# EAGLE board audio-pa-250mW-7.2V (EAGLE 5.10)

Size 160 x 100 mm. Coordinates in mm from the lower left corner, seen from the top.
Outline: 0,0 160,0 160,100 0,100 0,0
Copper layers (1*16): Top 0.035mm / dielectric 1.5mm / Bottom 0.035mm
Design rules "default": minimum track width 10mil, minimum drill 24mil, track to track 8mil, track to pad 8mil, pad to pad 8mil, via to via 8mil, smd to smd 8mil, copper to edge 40mil, drill to drill 8mil, minimum pad ring 10mil, minimum via ring 8mil, stop-mask expansion 4mil, vias tented up to drill 0mil, thermal gap 10mil

## Footprints (pad centres in the part's own frame; a part is rotated, then mirrored left to right if it is on the bottom)
CPOL-RADIAL-10UF-25V = drill 0.7 pad 1.651 square: 1 1.27,0 | drill 0.7 pad 1.651 round: 2 -1.27,0
CAP-PTH-5MM = drill 0.7 pad 1.778 round: 1 -2.5,0; 2 2.5,0
CPOL-RADIAL-100UF-25V = drill 0.7 pad 1.651 square: 1 1.27,0 | drill 0.7 pad 1.651 round: 2 -1.27,0
DIODE-1N4148 = drill 0.9 pad 1.93 round: A -3.81,0; C 3.81,0
POTA_16 = drill 0.813 pad 2.54 octagon: ROTOR 0,0; SCCW -5.08,0; SCW 5.08,0
4,16O1,6 = drill 1.6 pad 4.166 octagon: 1 0,0
0207/2V = drill 0.813 pad 1.778 octagon: 1 -1.27,0; 2 1.27,0
AL60P = drill 1.016 pad 2.54 octagon: 1 -3.251,0; 2 3.251,0
TO92-EBC = drill 0.813 pad 1.524 long: B 0,-1.27; C 2.54,-1.27; E -2.54,-1.27

## Placement (x,y rotation side)
C1  10uF  [CPOL-RADIAL-10UF-25V]  40.64,58.42 90 top
C2  471  [CAP-PTH-5MM]  59.69,36.83 90 top
C3  2.2uF  [CPOL-RADIAL-10UF-25V]  35.56,43.18 0 top
C5  220uF  [CPOL-RADIAL-100UF-25V]  48.26,67.31 0 top
C7  220uF  [CPOL-RADIAL-100UF-25V]  60.96,59.69 0 top
D1  [DIODE-1N4148]  57.15,53.34 180 top
D2  1N4148  [DIODE-1N4148]  53.34,49.53 270 top
P1  [POTA_16]  3.81,40.64 270 top
PAD2  IN  [4,16O1,6]  8.89,2.54 0 top
R1  33k  [0207/2V]  54.61,46.99 180 top
R3  22k  [0207/2V]  44.45,48.26 90 top
R4  2.2k  [0207/2V]  49.53,54.61 90 top
R5  2R  [0207/2V]  63.5,53.34 90 top
R6  2.4k  [0207/2V]  58.42,54.61 90 top
R7  22k  [0207/2V]  44.45,36.83 270 top
R8  68R  [0207/2V]  44.45,54.61 90 top
R9  510R  [0207/2V]  57.15,53.34 180 top
R10  2R  [0207/2V]  67.31,53.34 270 top
SP1  AL60P  [AL60P]  64.77,69.85 0 top
T1  9015  [TO92-EBC]  49.53,46.99 270 top
T2  9014  [TO92-EBC]  50.8,33.02 180 top
T3  8050  [TO92-EBC]  60.96,45.72 180 top
T4  8550  [TO92-EBC]  54.61,40.64 180 top

## Library data of the parts
C1-C3 C5 C7 D1 D2 P1 R1 R3-R10 T1-T4 = digital-toy
PAD2 = wirepad
SP1 = buzzer

## Nets
GND: C5.2 P1.SCCW R3.2 R7.2 R8.1 T2.E T4.C
N$1: R10.2 T4.E
N$2: C1.2 R8.2
N$3: C2.2 D2.C T2.C T4.B
N$4: C3.1 R1.2 R3.1 T1.B
N$5: R5.1 T3.E
N$6: C1.1 R4.1 T1.E
N$7: D1.C D2.A R9.2
N$8: D1.A R6.1 R9.1 T3.B
N$9: C7.2 R6.2 SP1.2
N$10: C2.1 R7.1 T1.C T2.B
N$11: P1.SCW PAD2.1
N$12: C3.2 P1.ROTOR
N$13: C7.1 R4.2 R5.2 R10.1
VCC: C5.1 R1.1 SP1.1 T3.C

## Tracks (layer width: path | path; a pad name or v marks a point on that pad's centre or on a via)
GND  (6 unrouted)
N$1  (1 unrouted)
N$2  (1 unrouted)
N$3  (3 unrouted)
N$4  (3 unrouted)
N$5  (1 unrouted)
N$6  (2 unrouted)
N$7  (1 unrouted)
N$8  (2 unrouted)
N$9  (2 unrouted)
N$10  (3 unrouted)
N$11  (1 unrouted)
N$12  (1 unrouted)
N$13  (3 unrouted)
VCC  (3 unrouted)